# Altium PCB PCB1.PcbDoc
Units mm, origin at the board's own origin, x right, y up, seen from the top; angles counter-clockwise.
Board outline 34.92 x 80.14 mm, 2 copper layers (Top Layer, Bottom Layer); 138 components, 23 nets, 570 pads, 0 vias.
Unrouted connection lines stored in the file: 158.
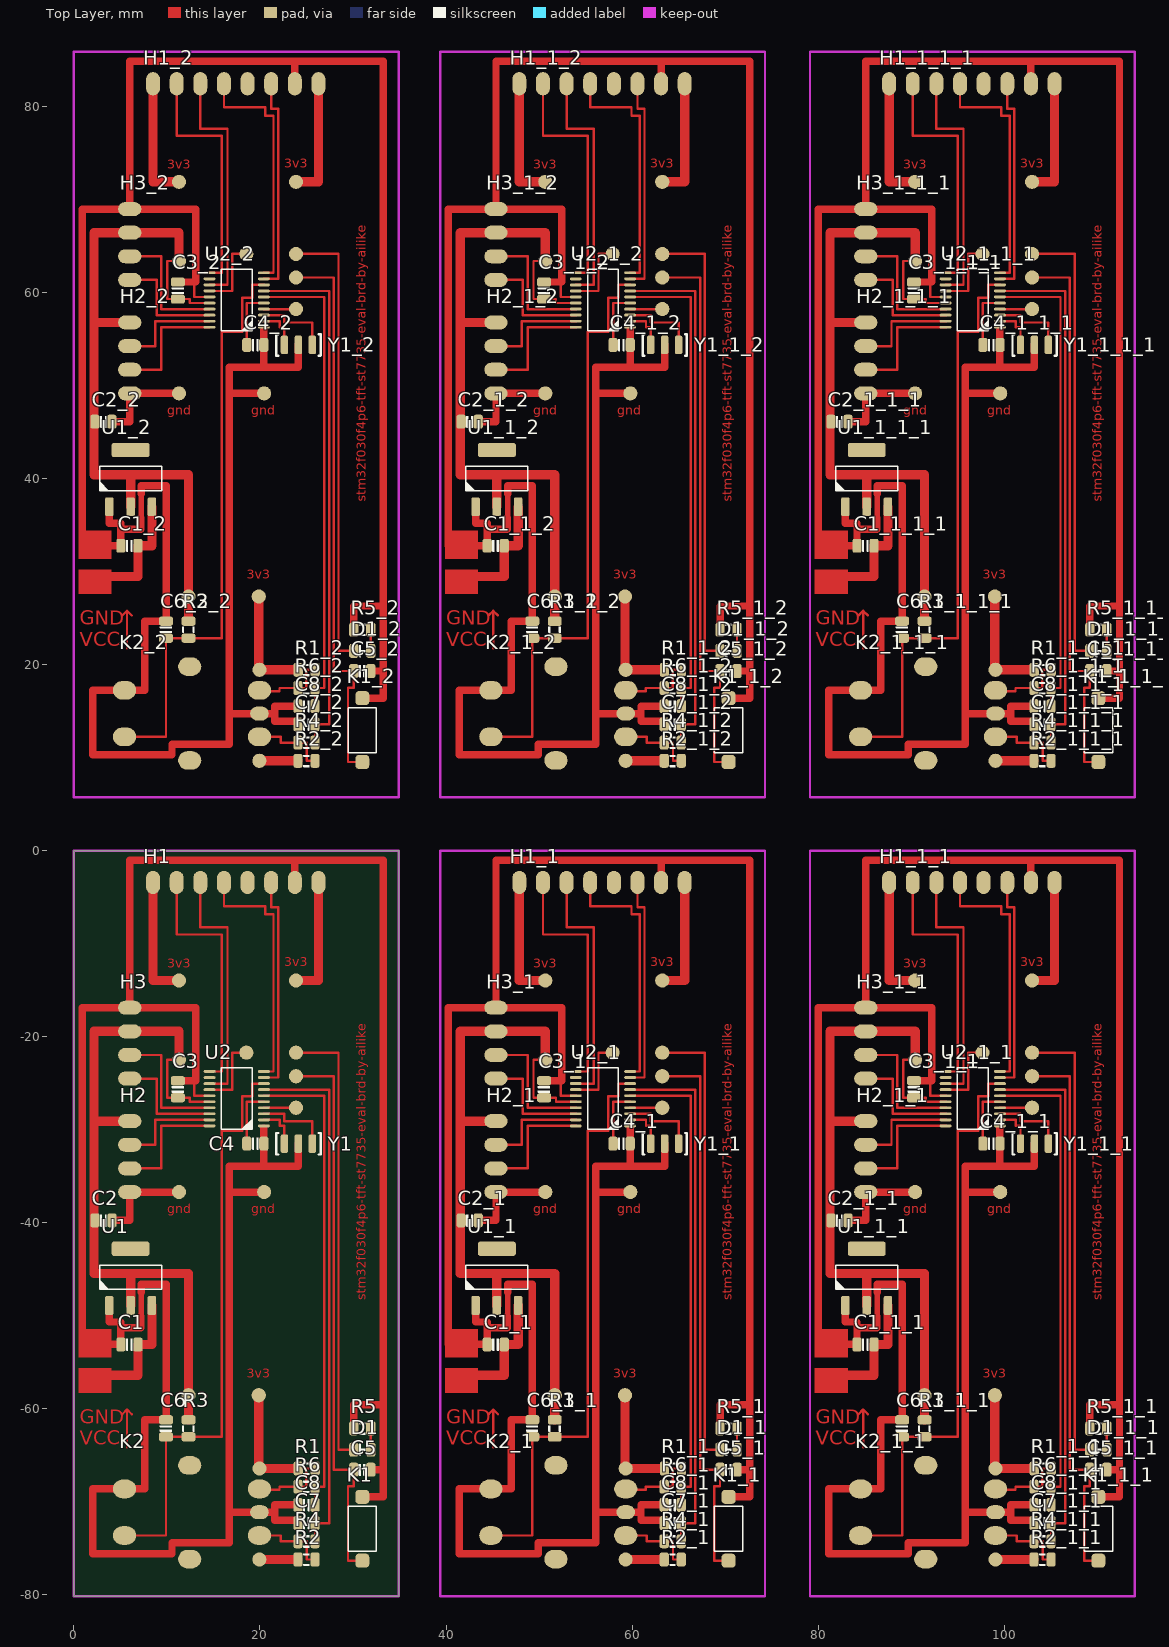
[diagram p0: Top Layer view]
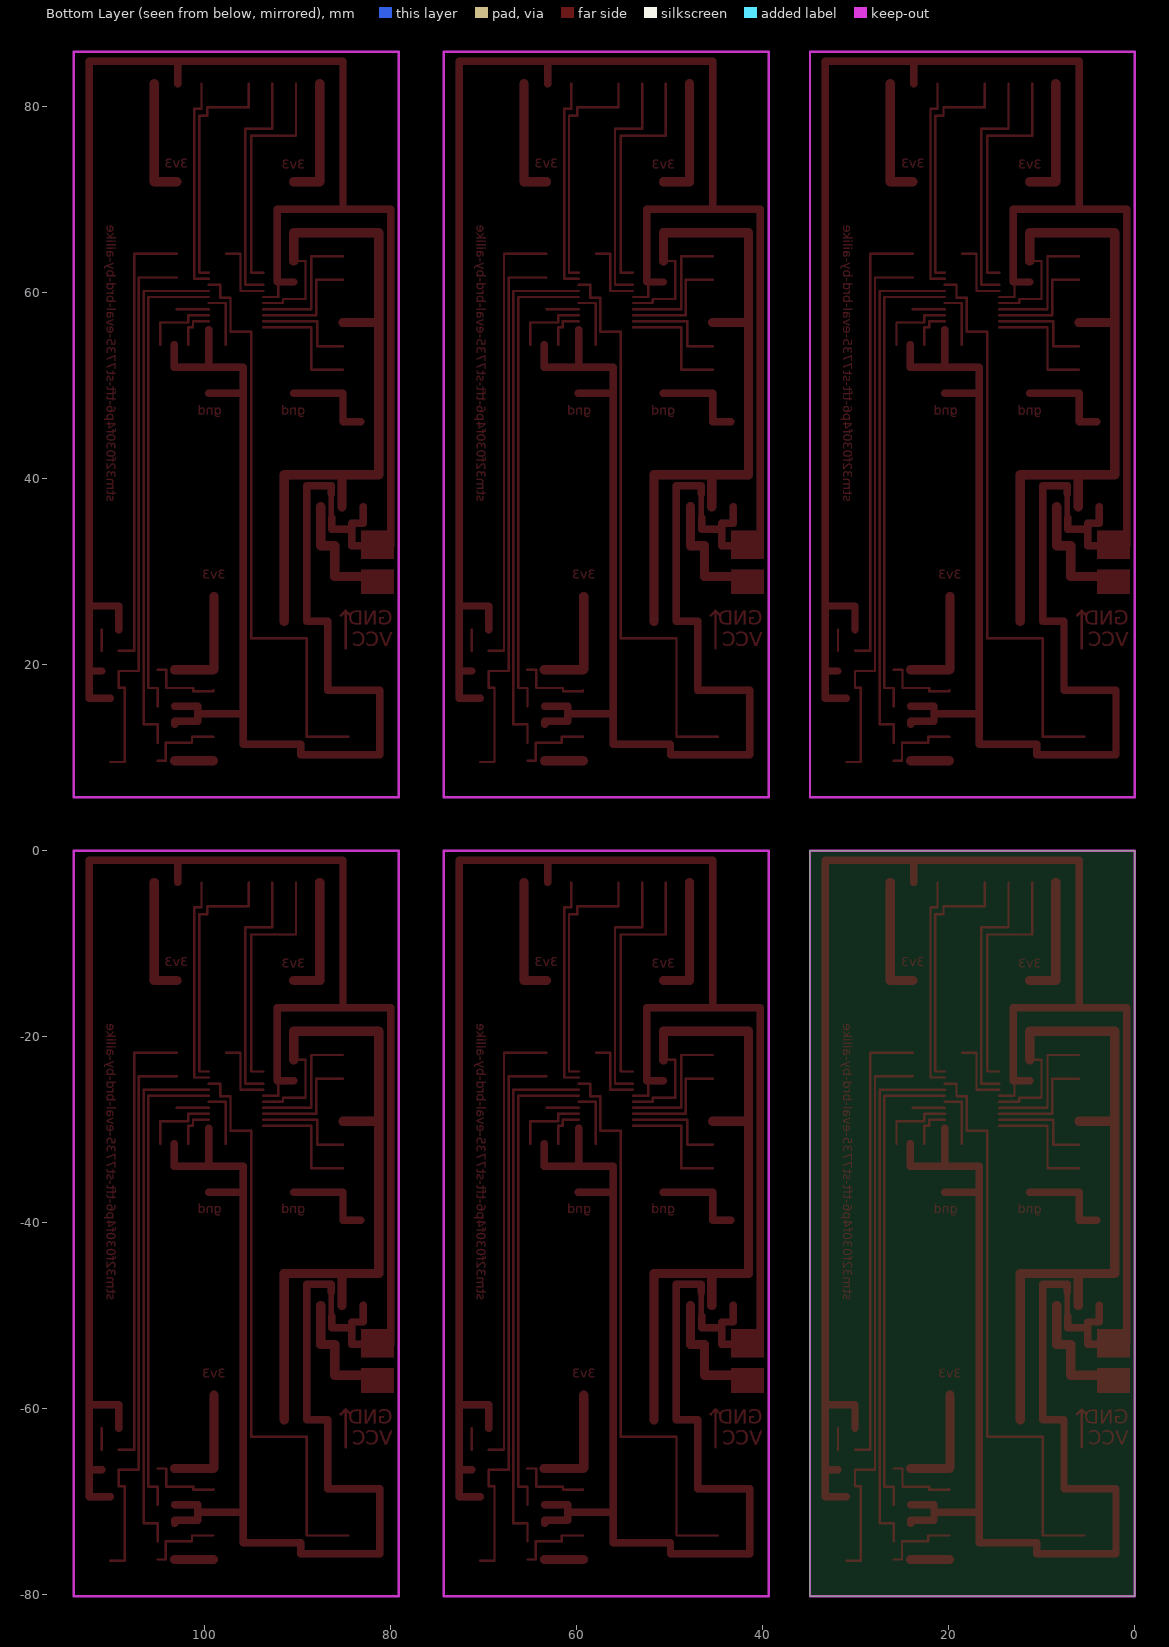
[diagram p1: Bottom Layer view, seen from below]

## Layer stack, top to bottom
Top Solder: solder mask 0.0102, Solder Resist, Dk 3.5
Top Layer: signal copper 0.0356
Dielectric 1: dielectric 0.32, FR-4, Dk 4.8
Bottom Layer: signal copper 0.0356
Bottom Solder: solder mask 0.0102, Solder Resist, Dk 3.5

## Board outline
0,-80.137 34.925,-80.137 34.925,0 0,0

## Design rules (kind name [scope] priority, off if disabled: settings)
Clearance [All] p1: gap=0.254 ignorepadtopadclearanceinfootprint=FALSE except(0: Arc-Hole Track-Hole SMDPad-Hole THPad-Hole Via-Hole Fill-Hole Poly-Hole Region-Hole Text-Hole)
PolygonConnect [All] p1: connectstyle=Relief reliefconductorwidth=0.254 reliefentries=4 polygonreliefangle="90 Angle" airgapwidth=0.254
RoutingVias [All] p1: holewidth=0.711 width=1.27 viastyle="Through Hole" minholewidth=0.711 minwidth=1.27 maxholewidth=0.711 maxwidth=1.27
SolderMaskExpansion [All] p1: expansion=0.102
Width [All] p1: maxlimit=10 minlimit=0.254 preferedwidth=0.254
30 further rules are at their usual default settings.

## Classes and differential pairs
component class Sheet1: C1 C2 C3 C4 C5 C6 C7 C8 D1 H1 H2 H3 K1 K2 R1 R2 R3 R4 R5 R6 U1 U2 Y1

## Components (designator, comment, footprint, x,y, rotation, side; value= is the part's Value field where it differs from the comment)
C1 "HDR2x10_2.54" CAP_0805 5.969,-53.086 r0 top value=0.1uf
C1_1 "HDR2x10_2.54" CAP_0805 45.339,-53.086 r0 top value=0.1uf (schematic designator C1)
C1_1_1 "HDR2x10_2.54" CAP_0805 85.09,-53.086 r0 top value=0.1uf (schematic designator C1)
C1_1_1_1 "HDR2x10_2.54" CAP_0805 85.09,32.766 r0 top value=0.1uf (schematic designator C1)
C1_1_2 "HDR2x10_2.54" CAP_0805 45.339,32.766 r0 top value=0.1uf (schematic designator C1)
C1_2 "HDR2x10_2.54" CAP_0805 5.969,32.766 r0 top value=0.1uf (schematic designator C1)
C2 "HDR2x10_2.54" CAP_0805 3.175,-39.751 r180 top value=0,1uf
C2_1 "HDR2x10_2.54" CAP_0805 42.545,-39.751 r180 top value=0,1uf (schematic designator C2)
C2_1_1 "HDR2x10_2.54" CAP_0805 82.296,-39.751 r180 top value=0,1uf (schematic designator C2)
C2_1_1_1 "HDR2x10_2.54" CAP_0805 82.296,46.101 r180 top value=0,1uf (schematic designator C2)
C2_1_2 "HDR2x10_2.54" CAP_0805 42.545,46.101 r180 top value=0,1uf (schematic designator C2)
C2_2 "HDR2x10_2.54" CAP_0805 3.175,46.101 r180 top value=0,1uf (schematic designator C2)
C3 "HDR2x10_2.54" CAP_0805 11.176,-25.654 r270 top value=0.1uf
C3_1 "HDR2x10_2.54" CAP_0805 50.546,-25.654 r270 top value=0.1uf (schematic designator C3)
C3_1_1 "HDR2x10_2.54" CAP_0805 90.297,-25.654 r270 top value=0.1uf (schematic designator C3)
C3_1_1_1 "HDR2x10_2.54" CAP_0805 90.297,60.198 r270 top value=0.1uf (schematic designator C3)
C3_1_2 "HDR2x10_2.54" CAP_0805 50.546,60.198 r270 top value=0.1uf (schematic designator C3)
C3_2 "HDR2x10_2.54" CAP_0805 11.176,60.198 r270 top value=0.1uf (schematic designator C3)
C4 "HDR2x10_2.54" CAP_0805 19.507,-31.496 r0 top value=0.1uf
C4_1 "HDR2x10_2.54" CAP_0805 58.877,-31.496 r0 top value=0.1uf (schematic designator C4)
C4_1_1 "HDR2x10_2.54" CAP_0805 98.628,-31.496 r0 top value=0.1uf (schematic designator C4)
C4_1_1_1 "HDR2x10_2.54" CAP_0805 98.628,54.356 r0 top value=0.1uf (schematic designator C4)
C4_1_2 "HDR2x10_2.54" CAP_0805 58.877,54.356 r0 top value=0.1uf (schematic designator C4)
C4_2 "HDR2x10_2.54" CAP_0805 19.507,54.356 r0 top value=0.1uf (schematic designator C4)
C5 "HDR2x10_2.54" CAP_0805 31,-66.548 r180 top value=0.1uf
C5_1 "HDR2x10_2.54" CAP_0805 70.37,-66.548 r180 top value=0.1uf (schematic designator C5)
C5_1_1 "HDR2x10_2.54" CAP_0805 110.121,-66.548 r180 top value=0.1uf (schematic designator C5)
C5_1_1_1 "HDR2x10_2.54" CAP_0805 110.121,19.304 r180 top value=0.1uf (schematic designator C5)
C5_1_2 "HDR2x10_2.54" CAP_0805 70.37,19.304 r180 top value=0.1uf (schematic designator C5)
C5_2 "HDR2x10_2.54" CAP_0805 31,19.304 r180 top value=0.1uf (schematic designator C5)
C6 "HDR2x10_2.54" CAP_0805 9.906,-62.103 r270 top value=0.1uf
C6_1 "HDR2x10_2.54" CAP_0805 49.276,-62.103 r270 top value=0.1uf (schematic designator C6)
C6_1_1 "HDR2x10_2.54" CAP_0805 89.027,-62.103 r270 top value=0.1uf (schematic designator C6)
C6_1_1_1 "HDR2x10_2.54" CAP_0805 89.027,23.749 r270 top value=0.1uf (schematic designator C6)
C6_1_2 "HDR2x10_2.54" CAP_0805 49.276,23.749 r270 top value=0.1uf (schematic designator C6)
C6_2 "HDR2x10_2.54" CAP_0805 9.906,23.749 r270 top value=0.1uf (schematic designator C6)
C7 "HDR2x10_2.54" CAP_0805 25,-72.288 r0 top value=10nf
C7_1 "HDR2x10_2.54" CAP_0805 64.37,-72.288 r0 top value=10nf (schematic designator C7)
C7_1_1 "HDR2x10_2.54" CAP_0805 104.121,-72.288 r0 top value=10nf (schematic designator C7)
C7_1_1_1 "HDR2x10_2.54" CAP_0805 104.121,13.564 r0 top value=10nf (schematic designator C7)
C7_1_2 "HDR2x10_2.54" CAP_0805 64.37,13.564 r0 top value=10nf (schematic designator C7)
C7_2 "HDR2x10_2.54" CAP_0805 25,13.564 r0 top value=10nf (schematic designator C7)
C8 "HDR2x10_2.54" CAP_0805 25,-70.333 r0 top value=10nf
C8_1 "HDR2x10_2.54" CAP_0805 64.37,-70.333 r0 top value=10nf (schematic designator C8)
C8_1_1 "HDR2x10_2.54" CAP_0805 104.121,-70.333 r0 top value=10nf (schematic designator C8)
C8_1_1_1 "HDR2x10_2.54" CAP_0805 104.121,15.519 r0 top value=10nf (schematic designator C8)
C8_1_2 "HDR2x10_2.54" CAP_0805 64.37,15.519 r0 top value=10nf (schematic designator C8)
C8_2 "HDR2x10_2.54" CAP_0805 25,15.519 r0 top value=10nf (schematic designator C8)
D1 "HDR2x10_2.54" LED_0805_RED 31,-64.389 r0 top value=color?
D1_1 "HDR2x10_2.54" LED_0805_RED 70.37,-64.389 r0 top value=color? (schematic designator D1)
D1_1_1 "HDR2x10_2.54" LED_0805_RED 110.121,-64.389 r0 top value=color? (schematic designator D1)
D1_1_1_1 "HDR2x10_2.54" LED_0805_RED 110.121,21.463 r0 top value=color? (schematic designator D1)
D1_1_2 "HDR2x10_2.54" LED_0805_RED 70.37,21.463 r0 top value=color? (schematic designator D1)
D1_2 "HDR2x10_2.54" LED_0805_RED 31,21.463 r0 top value=color? (schematic designator D1)
H1 "HDR2x10_2.54" HDR1X8_2.54_180 26.289,-3.429 r270 top locked value=2.54
H1_1 "HDR2x10_2.54" HDR1X8_2.54_180 65.659,-3.429 r270 top locked value=2.54 (schematic designator H1)
H1_1_1 "HDR2x10_2.54" HDR1X8_2.54_180 105.41,-3.429 r270 top locked value=2.54 (schematic designator H1)
H1_1_1_1 "HDR2x10_2.54" HDR1X8_2.54_180 105.41,82.423 r270 top locked value=2.54 (schematic designator H1)
H1_1_2 "HDR2x10_2.54" HDR1X8_2.54_180 65.659,82.423 r270 top locked value=2.54 (schematic designator H1)
H1_2 "HDR2x10_2.54" HDR1X8_2.54_180 26.289,82.423 r270 top locked value=2.54 (schematic designator H1)
H2 "HDR2x10_2.54" HDR1x4_2.54_180 6,-29.083 r0 top locked
H2_1 "HDR2x10_2.54" HDR1x4_2.54_180 45.37,-29.083 r0 top locked (schematic designator H2)
H2_1_1 "HDR2x10_2.54" HDR1x4_2.54_180 85.121,-29.083 r0 top locked (schematic designator H2)
H2_1_1_1 "HDR2x10_2.54" HDR1x4_2.54_180 85.121,56.769 r0 top locked (schematic designator H2)
H2_1_2 "HDR2x10_2.54" HDR1x4_2.54_180 45.37,56.769 r0 top locked (schematic designator H2)
H2_2 "HDR2x10_2.54" HDR1x4_2.54_180 6,56.769 r0 top locked (schematic designator H2)
H3 "HDR2x10_2.54" HDR1x4_2.54_180 6,-16.891 r0 top locked
H3_1 "HDR2x10_2.54" HDR1x4_2.54_180 45.37,-16.891 r0 top locked (schematic designator H3)
H3_1_1 "HDR2x10_2.54" HDR1x4_2.54_180 85.121,-16.891 r0 top locked (schematic designator H3)
H3_1_1_1 "HDR2x10_2.54" HDR1x4_2.54_180 85.121,68.961 r0 top locked (schematic designator H3)
H3_1_2 "HDR2x10_2.54" HDR1x4_2.54_180 45.37,68.961 r0 top locked (schematic designator H3)
H3_2 "HDR2x10_2.54" HDR1x4_2.54_180 6,68.961 r0 top locked (schematic designator H3)
K1 "HDR2x10_2.54" ButtonTACT_3x6x2.5_180 31,-72.898 r90 top value=3x6
K1_1 "HDR2x10_2.54" ButtonTACT_3x6x2.5_180 70.37,-72.898 r90 top value=3x6 (schematic designator K1)
K1_1_1 "HDR2x10_2.54" ButtonTACT_3x6x2.5_180 110.121,-72.898 r90 top value=3x6 (schematic designator K1)
K1_1_1_1 "HDR2x10_2.54" ButtonTACT_3x6x2.5_180 110.121,12.954 r90 top value=3x6 (schematic designator K1)
K1_1_2 "HDR2x10_2.54" ButtonTACT_3x6x2.5_180 70.37,12.954 r90 top value=3x6 (schematic designator K1)
K1_2 "HDR2x10_2.54" ButtonTACT_3x6x2.5_180 31,12.954 r90 top value=3x6 (schematic designator K1)
K2 "HDR2x10_2.54" RotaryEncoder 12.446,-71.12 r90 top value=RotaryEncoder
K2_1 "HDR2x10_2.54" RotaryEncoder 51.816,-71.12 r90 top value=RotaryEncoder (schematic designator K2)
K2_1_1 "HDR2x10_2.54" RotaryEncoder 91.567,-71.12 r90 top value=RotaryEncoder (schematic designator K2)
K2_1_1_1 "HDR2x10_2.54" RotaryEncoder 91.567,14.732 r90 top value=RotaryEncoder (schematic designator K2)
K2_1_2 "HDR2x10_2.54" RotaryEncoder 51.816,14.732 r90 top value=RotaryEncoder (schematic designator K2)
K2_2 "HDR2x10_2.54" RotaryEncoder 12.446,14.732 r90 top value=RotaryEncoder (schematic designator K2)
R1 "HDR2x10_2.54" RES_0805 25.019,-66.421 r180 top value=10K
R1_1 "HDR2x10_2.54" RES_0805 64.389,-66.421 r180 top value=10K (schematic designator R1)
R1_1_1 "HDR2x10_2.54" RES_0805 104.14,-66.421 r180 top value=10K (schematic designator R1)
R1_1_1_1 "HDR2x10_2.54" RES_0805 104.14,19.431 r180 top value=10K (schematic designator R1)
R1_1_2 "HDR2x10_2.54" RES_0805 64.389,19.431 r180 top value=10K (schematic designator R1)
R1_2 "HDR2x10_2.54" RES_0805 25.019,19.431 r180 top value=10K (schematic designator R1)
R2 "HDR2x10_2.54" RES_0805 25,-76.2 r180 top value=10K
R2_1 "HDR2x10_2.54" RES_0805 64.37,-76.2 r180 top value=10K (schematic designator R2)
R2_1_1 "HDR2x10_2.54" RES_0805 104.121,-76.2 r180 top value=10K (schematic designator R2)
R2_1_1_1 "HDR2x10_2.54" RES_0805 104.121,9.652 r180 top value=10K (schematic designator R2)
R2_1_2 "HDR2x10_2.54" RES_0805 64.37,9.652 r180 top value=10K (schematic designator R2)
R2_2 "HDR2x10_2.54" RES_0805 25,9.652 r180 top value=10K (schematic designator R2)
R3 "HDR2x10_2.54" RES_0805 12.319,-62.103 r270 top value=10k
R3_1 "HDR2x10_2.54" RES_0805 51.689,-62.103 r270 top value=10k (schematic designator R3)
R3_1_1 "HDR2x10_2.54" RES_0805 91.44,-62.103 r270 top value=10k (schematic designator R3)
R3_1_1_1 "HDR2x10_2.54" RES_0805 91.44,23.749 r270 top value=10k (schematic designator R3)
R3_1_2 "HDR2x10_2.54" RES_0805 51.689,23.749 r270 top value=10k (schematic designator R3)
R3_2 "HDR2x10_2.54" RES_0805 12.319,23.749 r270 top value=10k (schematic designator R3)
R4 "HDR2x10_2.54" RES_0805 25,-74.244 r180 top value=10K
R4_1 "HDR2x10_2.54" RES_0805 64.37,-74.244 r180 top value=10K (schematic designator R4)
R4_1_1 "HDR2x10_2.54" RES_0805 104.121,-74.244 r180 top value=10K (schematic designator R4)
R4_1_1_1 "HDR2x10_2.54" RES_0805 104.121,11.608 r180 top value=10K (schematic designator R4)
R4_1_2 "HDR2x10_2.54" RES_0805 64.37,11.608 r180 top value=10K (schematic designator R4)
R4_2 "HDR2x10_2.54" RES_0805 25,11.608 r180 top value=10K (schematic designator R4)
R5 "HDR2x10_2.54" RES_0805 31,-62.103 r180 top value=1K
R5_1 "HDR2x10_2.54" RES_0805 70.37,-62.103 r180 top value=1K (schematic designator R5)
R5_1_1 "HDR2x10_2.54" RES_0805 110.121,-62.103 r180 top value=1K (schematic designator R5)
R5_1_1_1 "HDR2x10_2.54" RES_0805 110.121,23.749 r180 top value=1K (schematic designator R5)
R5_1_2 "HDR2x10_2.54" RES_0805 70.37,23.749 r180 top value=1K (schematic designator R5)
R5_2 "HDR2x10_2.54" RES_0805 31,23.749 r180 top value=1K (schematic designator R5)
R6 "HDR2x10_2.54" RES_0805 25,-68.377 r180 top value=10k
R6_1 "HDR2x10_2.54" RES_0805 64.37,-68.377 r180 top value=10k (schematic designator R6)
R6_1_1 "HDR2x10_2.54" RES_0805 104.121,-68.377 r180 top value=10k (schematic designator R6)
R6_1_1_1 "HDR2x10_2.54" RES_0805 104.121,17.475 r180 top value=10k (schematic designator R6)
R6_1_2 "HDR2x10_2.54" RES_0805 64.37,17.475 r180 top value=10k (schematic designator R6)
R6_2 "HDR2x10_2.54" RES_0805 25,17.475 r180 top value=10k (schematic designator R6)
U1 "HDR2x10_2.54" SOT223-3 6.096,-45.847 r90 top
U1_1 "HDR2x10_2.54" SOT223-3 45.466,-45.847 r90 top (schematic designator U1)
U1_1_1 "HDR2x10_2.54" SOT223-3 85.217,-45.847 r90 top (schematic designator U1)
U1_1_1_1 "HDR2x10_2.54" SOT223-3 85.217,40.005 r90 top (schematic designator U1)
U1_1_2 "HDR2x10_2.54" SOT223-3 45.466,40.005 r90 top (schematic designator U1)
U1_2 "HDR2x10_2.54" SOT223-3 6.096,40.005 r90 top (schematic designator U1)
U2 "HDR2x10_2.54" TSSOP_E170_P0.65_20 17.5,-26.67 r180 top
U2_1 "HDR2x10_2.54" TSSOP_E170_P0.65_20 56.87,-26.67 r180 top (schematic designator U2)
U2_1_1 "HDR2x10_2.54" TSSOP_E170_P0.65_20 96.621,-26.67 r180 top (schematic designator U2)
U2_1_1_1 "HDR2x10_2.54" TSSOP_E170_P0.65_20 96.621,59.182 r180 top (schematic designator U2)
U2_1_2 "HDR2x10_2.54" TSSOP_E170_P0.65_20 56.87,59.182 r180 top (schematic designator U2)
U2_2 "HDR2x10_2.54" TSSOP_E170_P0.65_20 17.5,59.182 r180 top (schematic designator U2)
Y1 "HDR2x10_2.54" XTAL_3P_CSTCE_8M_3.2*1.3 22.63,-31.496 r90 top
Y1_1 "HDR2x10_2.54" XTAL_3P_CSTCE_8M_3.2*1.3 62,-31.496 r90 top (schematic designator Y1)
Y1_1_1 "HDR2x10_2.54" XTAL_3P_CSTCE_8M_3.2*1.3 101.751,-31.496 r90 top (schematic designator Y1)
Y1_1_1_1 "HDR2x10_2.54" XTAL_3P_CSTCE_8M_3.2*1.3 101.751,54.356 r90 top (schematic designator Y1)
Y1_1_2 "HDR2x10_2.54" XTAL_3P_CSTCE_8M_3.2*1.3 62,54.356 r90 top (schematic designator Y1)
Y1_2 "HDR2x10_2.54" XTAL_3P_CSTCE_8M_3.2*1.3 22.63,54.356 r90 top (schematic designator Y1)

## Footprints (in the part's own frame and the unit in brackets; to place one, negate y for a bottom-side part, rotate by r counter-clockwise, add the part's x,y. Pads: shape width x height; smd on the part's side, far side on the other; paste and mask are expansions set on the pad)
ButtonTACT_3x6x2.5_180 [mm]
  rrect50% 1.5x1.5 smd: 1(-3.429,0) 2(3.429,0)
  silkscreen extent -2.41,-1.52 2.41,1.52, body extent -4,-1.8 4,1.8, height 2.4
CAP_0805 [mm]
  rrect50% 1x1.5 smd: 1(-0.914,0) 2(0.914,0)
  silkscreen extent -0.3,-0.61 0.3,0.61, body extent -1,-0.62 1,0.63, height 1
HDR1x4_2.54_180 [mm]
  oval 2.5x1.5 smd: 1(0,0) 2(0,-2.54) 3(0,-5.08) 4(0,-7.62)
  body extent -1.25,-8.89 1.25,1.27, height 8.2
HDR1X8_2.54_180 [mm]
  oval 2.5x1.5 smd: 1(0,0) 2(0,-2.54) 3(0,-5.08) 4(0,-7.62) 5(0,-10.16) 6(0,-12.7) 7(0,-15.24) 8(0,-17.78)
  body extent -1.25,-19.05 1.25,1.27, height 8.2
LED_0805_RED [mm]
  rrect50% 1x1.5 smd: 1(-0.914,0) 2(0.914,0)
  silkscreen extent -0.29,-0.62 0.3,0.62, body extent -1.01,-0.62 1.01,0.63, height 1.1
RES_0805 [mm]
  rrect50% 1x1.5 smd: 1(-0.914,0) 2(0.914,0)
  silkscreen extent -0.29,-0.62 0.29,0.62, body extent -1,-0.62 1,0.63, height 0.6
RotaryEncoder [mm]
  oval 1.981x2.489 smd: 0(-5.04,0) 0(5.04,0)
  oval 2x2.5 smd: 1(-2.5,-7.5) 3(2.5,-7.5) 4(2.5,7) 5(-2.5,7)
  oval 1.5x2 smd: 2(0,-7.5)
SOT223-3 [mil]
  rrect40% 80x36 smd: 1(-120,90.16) 2(-120,0) 3(-120,-90.16)
  rrect30% 60x160 smd: 4(120,0)
  silkscreen extent -51,-131 51,131, body extent -144,-132 144,132, height 71
TSSOP_E170_P0.65_20 [mil]
  oval 50x12 smd: 1(-115,115.16) 2(-115,89.57) 3(-115,63.98) 4(-115,38.39) 5(-115,12.8) 6(-115,-12.8) 7(-115,-38.39) 8(-115,-63.98) 9(-115,-89.57) 10(-115,-115.16) 11(115,-115.16) 12(115,-89.57) 13(115,-63.98) 14(115,-38.39) 15(115,-12.8) 16(115,12.8) 17(115,38.39) 18(115,63.98) 19(115,89.57) 20(115,115.16)
  silkscreen extent -65,-130 65,130, body extent -126,-130 126,130, height 42
XTAL_3P_CSTCE_8M_3.2*1.3 [mm]
  rrect50% 2x0.8 smd: 1(0,0) 2(0,-1.5) 3(0,-3)
  silkscreen extent -1.17,-3.89 1.14,0.86, body extent -1,-3.75 1,0.75, height 1.15

## Part data
C1 C1_1 C1_1_1 C1_1_1_1 C1_1_2 C1_2 C2 C2_1 C2_1_1 C2_1_1_1 C2_1_2 C2_2 C3 C3_1 C3_1_1 C3_1_1_1 C3_1_2 C3_2 C4 C4_1 C4_1_1 C4_1_1_1 C4_1_2 C4_2 C5 C5_1 C5_1_1 C5_1_1_1 C5_1_2 C5_2 C6 C6_1 C6_1_1 C6_1_1_1 C6_1_2 C6_2 C7 C7_1 C7_1_1 C7_1_1_1 C7_1_2 C7_2 C8 C8_1 C8_1_1 C8_1_1_1 C8_1_2 C8_2: library part Cap_0805, "Capacitor", Specification="X7R 50V", Type=0805
D1 D1_1 D1_1_1 D1_1_1_1 D1_1_2 D1_2: library part LED_0805, "LED", Type=0805
H1 H1_1 H1_1_1 H1_1_1_1 H1_1_2 H1_2: library part HDR1x8_2.54, "Header", Type="DIP 1x8"
H2 H2_1 H2_1_1 H2_1_1_1 H2_1_2 H2_2 H3 H3_1 H3_1_1 H3_1_1_1 H3_1_2 H3_2: library part HDR1x4_2.54, "Header"
K1 K1_1 K1_1_1 K1_1_1_1 K1_1_2 K1_2: library part ButtonTACT_3x6x2.5_180, "Button", Type="TACT 2P"
K2 K2_1 K2_1_1 K2_1_1_1 K2_1_2 K2_2: library part RotaryEncoder, "Encoder"
R1 R1_1 R1_1_1 R1_1_1_1 R1_1_2 R1_2 R2 R2_1 R2_1_1 R2_1_1_1 R2_1_2 R2_2 R3 R3_1 R3_1_1 R3_1_1_1 R3_1_2 R3_2 R4 R4_1 R4_1_1 R4_1_1_1 R4_1_2 R4_2 R5 R5_1 R5_1_1 R5_1_1_1 R5_1_2 R5_2 R6 R6_1 R6_1_1 R6_1_1_1 R6_1_2 R6_2: library part Res_0805, "Resistor", Specification=±5%, Type=0805
U1 U1_1 U1_1_1 U1_1_1_1 U1_1_2 U1_2: library part TLV1117, "Power"
U2 U2_1 U2_1_1 U2_1_1_1 U2_1_2 U2_2: library part STM32F03xF, "MCU"
Y1 Y1_1 Y1_1_1 Y1_1_1_1 Y1_1_2 Y1_2: library part XTAL-3PIN, "murata CSTCE 8M 3.2*1.3"

## Free pads (board coordinates)
  round 1.524 smd: 2(11.303,-36.703) 2(11.303,-22.479) 2(11.303,-13.97) 2(11.303,49.149) 2(11.303,63.373) 2(11.303,71.882) 2(12.319,-58.547) 2(12.319,27.305) 2(18.542,-21.717) 2(18.542,64.135) 2(19.874,-58.547) 2(19.874,27.305) 2(19.939,-76.2) 2(19.939,9.652) 2(19.946,-66.421) 2(19.946,19.431) 2(20.447,-36.703) 2(20.447,49.149) 2(23.876,-27.645) 2(23.876,-24.257) 2(23.876,-21.717) 2(23.876,-13.97) 2(23.876,58.207) 2(23.876,61.595) 2(23.876,64.135) 2(23.876,71.882) 2(50.673,-36.703) 2(50.673,-22.479) 2(50.673,-13.97) 2(50.673,49.149) 2(50.673,63.373) 2(50.673,71.882) 2(51.689,-58.547) 2(51.689,27.305) 2(57.912,-21.717) 2(57.912,64.135) 2(59.244,-58.547) 2(59.244,27.305) 2(59.309,-76.2) 2(59.309,9.652) 2(59.316,-66.421) 2(59.316,19.431) 2(59.817,-36.703) 2(59.817,49.149) 2(63.246,-27.645) 2(63.246,-24.257) 2(63.246,-21.717) 2(63.246,-13.97) 2(63.246,58.207) 2(63.246,61.595) 2(63.246,64.135) 2(63.246,71.882) 2(90.424,-36.703) 2(90.424,-22.479) 2(90.424,-13.97) 2(90.424,49.149) 2(90.424,63.373) 2(90.424,71.882) 2(91.44,-58.547) 2(91.44,27.305) 2(97.663,-21.717) 2(97.663,64.135) 2(98.995,-58.547) 2(98.995,27.305) 2(99.06,-76.2) 2(99.06,9.652) 2(99.067,-66.421) 2(99.067,19.431) 2(99.568,-36.703) 2(99.568,49.149) 2(102.997,-27.645) 2(102.997,-24.257) 2(102.997,-21.717) 2(102.997,-13.97) 2(102.997,58.207) 2(102.997,61.595) 2(102.997,64.135) 2(102.997,71.882)

## Nets (pads, with @x,y where several pads share a name; then routed paths per layer and width w, separated by ;. In a path a pad name is that pad's centre, name@x,y a point inside that pad or via, vN(x,y) a via of type N, cw(c..) or ccw(c..) an arc to the next point about the centre after c; other vN are vias at no path point)
3V3: C2.2 C2_1.2 C2_1_1.2 C2_1_1_1.2 C2_1_2.2 C2_2.2 C3.2 C3_1.2 C3_1_1.2 C3_1_1_1.2 C3_1_2.2 C3_2.2 C4.1 C4_1.1 C4_1_1.1 C4_1_1_1.1 C4_1_2.1 C4_2.1 H1.1 H1.8 H1_1.1 H1_1.8 H1_1_1.1 H1_1_1.8 H1_1_1_1.1 H1_1_1_1.8 H1_1_2.1 H1_1_2.8 H1_2.1 H1_2.8 H2.1 H2_1.1 H2_1_1.1 H2_1_1_1.1 H2_1_2.1 H2_2.1 H3.2 H3_1.2 H3_1_1.2 H3_1_1_1.2 H3_1_2.2 H3_2.2 pad.2@11.303,63.373 pad.2@11.303,71.882 pad.2@11.303,-13.97 pad.2@11.303,-22.479 pad.2@12.319,27.305 pad.2@12.319,-58.547 pad.2@19.874,27.305 pad.2@19.874,-58.547 pad.2@19.939,9.652 pad.2@19.939,-76.2 pad.2@19.946,19.431 pad.2@19.946,-66.421 pad.2@23.876,71.882 pad.2@23.876,-13.97 pad.2@50.673,63.373 pad.2@50.673,71.882 pad.2@50.673,-13.97 pad.2@50.673,-22.479 pad.2@51.689,27.305 pad.2@51.689,-58.547 pad.2@59.244,27.305 pad.2@59.244,-58.547 pad.2@59.309,9.652 pad.2@59.309,-76.2 pad.2@59.316,19.431 pad.2@59.316,-66.421 pad.2@63.246,71.882 pad.2@63.246,-13.97 pad.2@90.424,63.373 pad.2@90.424,71.882 pad.2@90.424,-13.97 pad.2@90.424,-22.479 pad.2@91.44,27.305 pad.2@91.44,-58.547 pad.2@98.995,27.305 pad.2@98.995,-58.547 pad.2@99.06,9.652 pad.2@99.06,-76.2 pad.2@99.067,19.431 pad.2@99.067,-66.421 pad.2@102.997,71.882 pad.2@102.997,-13.97 R1.2 R1_1.2 R1_1_1.2 R1_1_1_1.2 R1_1_2.2 R1_2.2 R2.2 R2_1.2 R2_1_1.2 R2_1_1_1.2 R2_1_2.2 R2_2.2 R3.1 R3_1.1 R3_1_1.1 R3_1_1_1.1 R3_1_2.1 R3_2.1 U1.2 U1_1.2 U1_1_1.2 U1_1_1_1.2 U1_1_2.2 U1_2.2 U2.5 U2.16 U2_1.5 U2_1.16 U2_1_1.5 U2_1_1.16 U2_1_1_1.5 U2_1_1_1.16 U2_1_2.5 U2_1_2.16 U2_2.5 U2_2.16 | length 783.2
  Top Layer w0.254: pad.2@11.303,-22.479 10.033,-22.479 10.033,-26.565 12.446,-26.565 12.446,-26.995 U2.16 ; pad.2@11.303,63.373 10.033,63.373 10.033,59.287 12.446,59.287 12.446,58.857 U2_2.16 ; C4.1 18.592,-26.995 U2.5 ; C4_2.1 18.592,58.857 U2_2.5 ; pad.2@50.673,-22.479 49.403,-22.479 49.403,-26.565 51.816,-26.565 51.816,-26.995 U2_1.16 ; pad.2@50.673,63.373 49.403,63.373 49.403,59.287 51.816,59.287 51.816,58.857 U2_1_2.16 ; C4_1.1 57.962,-26.995 U2_1.5 ; C4_1_2.1 57.962,58.857 U2_1_2.5 ; pad.2@90.424,-22.479 89.154,-22.479 89.154,-26.565 91.567,-26.565 91.567,-26.995 U2_1_1.16 ; pad.2@90.424,63.373 89.154,63.373 89.154,59.287 91.567,59.287 91.567,58.857 U2_1_1_1.16 ; C4_1_1.1 97.713,-26.995 U2_1_1.5 ; C4_1_1_1.1 97.713,58.857 U2_1_1_1.5
  Top Layer w1: H2.1 2.159,-29.083 ; H2_2.1 2.159,56.769 ; U1.2 6.096,-45.466 ; U1_2.2 6.096,40.386 ; H1.8 8.509,-13.97 pad.2@11.303,-13.97 ; H1_2.8 8.509,71.882 pad.2@11.303,71.882 ; pad.2@11.303,-22.479 11.303,-19.431 H3.2 2.159,-19.431 2.159,-29.083 ; pad.2@11.303,63.373 11.303,66.421 H3_2.2 2.159,66.421 2.159,56.769 ; R3.1 12.319,-45.466 6.096,-45.466 ; R3_2.1 12.319,40.386 6.096,40.386 ; pad.2@19.874,-58.547 19.874,-66.349 19.946,-66.421 R1.2 ; pad.2@19.874,27.305 19.874,19.503 19.946,19.431 R1_2.2 ; pad.2@19.939,-76.2 R2.2 ; pad.2@19.939,9.652 R2_2.2 ; pad.2@23.876,-13.97 26.289,-13.97 H1.1 ; pad.2@23.876,71.882 26.289,71.882 H1_2.1 ; H2_1.1 41.529,-29.083 ; H2_1_2.1 41.529,56.769 ; U1_1.2 45.466,-45.466 ; U1_1_2.2 45.466,40.386 ; H1_1.8 47.879,-13.97 pad.2@50.673,-13.97 ; H1_1_2.8 47.879,71.882 pad.2@50.673,71.882 ; pad.2@50.673,-22.479 50.673,-19.431 H3_1.2 41.529,-19.431 41.529,-29.083 ; pad.2@50.673,63.373 50.673,66.421 H3_1_2.2 41.529,66.421 41.529,56.769 ; R3_1.1 51.689,-45.466 45.466,-45.466 ; R3_1_2.1 51.689,40.386 45.466,40.386 ; pad.2@59.244,-58.547 59.244,-66.349 59.316,-66.421 R1_1.2 ; pad.2@59.244,27.305 59.244,19.503 59.316,19.431 R1_1_2.2 ; pad.2@59.309,-76.2 R2_1.2 ; pad.2@59.309,9.652 R2_1_2.2 ; pad.2@63.246,-13.97 65.659,-13.97 H1_1.1 ; pad.2@63.246,71.882 65.659,71.882 H1_1_2.1 ; H2_1_1.1 81.28,-29.083 ; H2_1_1_1.1 81.28,56.769 ; U1_1_1.2 85.217,-45.466 ; U1_1_1_1.2 85.217,40.386 ; H1_1_1.8 87.63,-13.97 pad.2@90.424,-13.97 ; H1_1_1_1.8 87.63,71.882 pad.2@90.424,71.882 ; pad.2@90.424,-22.479 90.424,-19.431 H3_1_1.2 81.28,-19.431 81.28,-29.083 ; pad.2@90.424,63.373 90.424,66.421 H3_1_1_1.2 81.28,66.421 81.28,56.769 ; R3_1_1.1 91.44,-45.466 85.217,-45.466 ; R3_1_1_1.1 91.44,40.386 85.217,40.386 ; pad.2@98.995,-58.547 98.995,-66.349 99.067,-66.421 R1_1_1.2 ; pad.2@98.995,27.305 98.995,19.503 99.067,19.431 R1_1_1_1.2 ; pad.2@99.06,-76.2 R2_1_1.2 ; pad.2@99.06,9.652 R2_1_1_1.2 ; pad.2@102.997,-13.97 105.41,-13.97 H1_1_1.1 ; pad.2@102.997,71.882 105.41,71.882 H1_1_1_1.1 ; 2.159,-29.083 2.159,-45.466 6.096,-45.466 ; 2.159,56.769 2.159,40.386 6.096,40.386 ; 41.529,-29.083 41.529,-45.466 45.466,-45.466 ; 41.529,56.769 41.529,40.386 45.466,40.386 ; 81.28,-29.083 81.28,-45.466 85.217,-45.466 ; 81.28,56.769 81.28,40.386 85.217,40.386
GND: C1.1 C1_1.1 C1_1_1.1 C1_1_1_1.1 C1_1_2.1 C1_2.1 C2.1 C2_1.1 C2_1_1.1 C2_1_1_1.1 C2_1_2.1 C2_2.1 C3.1 C3_1.1 C3_1_1.1 C3_1_1_1.1 C3_1_2.1 C3_2.1 C4.2 C4_1.2 C4_1_1.2 C4_1_1_1.2 C4_1_2.2 C4_2.2 C5.1 C5_1.1 C5_1_1.1 C5_1_1_1.1 C5_1_2.1 C5_2.1 C6.1 C6_1.1 C6_1_1.1 C6_1_1_1.1 C6_1_2.1 C6_2.1 C7.1 C7_1.1 C7_1_1.1 C7_1_1_1.1 C7_1_2.1 C7_2.1 C8.1 C8_1.1 C8_1_1.1 C8_1_1_1.1 C8_1_2.1 C8_2.1 H1.2 H1_1.2 H1_1_1.2 H1_1_1_1.2 H1_1_2.2 H1_2.2 H2.4 H2_1.4 H2_1_1.4 H2_1_1_1.4 H2_1_2.4 H2_2.4 H3.1 H3_1.1 H3_1_1.1 H3_1_1_1.1 H3_1_2.1 H3_2.1 K1.2 K1_1.2 K1_1_1.2 K1_1_1_1.2 K1_1_2.2 K1_2.2 K2.2 K2.4 K2_1.2 K2_1.4 K2_1_1.2 K2_1_1.4 K2_1_1_1.2 K2_1_1_1.4 K2_1_2.2 K2_1_2.4 K2_2.2 K2_2.4 pad.2@11.303,49.149 pad.2@11.303,-36.703 pad.2@20.447,49.149 pad.2@20.447,-36.703 pad.2@50.673,49.149 pad.2@50.673,-36.703 pad.2@59.817,49.149 pad.2@59.817,-36.703 pad.2@90.424,49.149 pad.2@90.424,-36.703 pad.2@99.568,49.149 pad.2@99.568,-36.703 R5.2 R5_1.2 R5_1_1.2 R5_1_1_1.2 R5_1_2.2 R5_2.2 U1.1 U1_1.1 U1_1_1.1 U1_1_1_1.1 U1_1_2.1 U1_2.1 U2.1 U2.15 U2_1.1 U2_1.15 U2_1_1.1 U2_1_1.15 U2_1_1_1.1 U2_1_1_1.15 U2_1_2.1 U2_1_2.15 U2_2.1 U2_2.15 Y1.2 Y1_1.2 Y1_1_1.2 Y1_1_1_1.2 Y1_1_2.2 Y1_2.2 | length 2019
  Top Layer w0.254: 12.954,-24.737 13.081,-24.737 12.944,-24.874 12.944,-26.345 U2.15 ; 12.954,61.115 13.081,61.115 12.944,60.978 12.944,59.507 U2_2.15 ; 52.324,-24.737 52.451,-24.737 52.314,-24.874 52.314,-26.345 U2_1.15 ; 52.324,61.115 52.451,61.115 52.314,60.978 52.314,59.507 U2_1_2.15 ; 92.075,-24.737 92.202,-24.737 92.065,-24.874 92.065,-26.345 U2_1_1.15 ; 92.075,61.115 92.202,61.115 92.065,60.978 92.065,59.507 U2_1_1_1.15
  Top Layer w0.6: 7.25,-50.006 7.25,-47.498 ; 7.25,35.846 7.25,38.354 ; 46.62,-50.006 46.62,-47.498 ; 46.62,35.846 46.62,38.354 ; 86.371,-50.006 86.371,-47.498 ; 86.371,35.846 86.371,38.354
  Top Layer w0.8: U1.1 3.806,-50.673 5.055,-50.673 5.055,-51.308 ; U1_2.1 3.806,35.179 5.055,35.179 5.055,34.544 ; C2.1 6,-39.751 H2.4 pad.2@11.303,-36.703 ; C2_2.1 6,46.101 H2_2.4 pad.2@11.303,49.149 ; C1.1@4.942,-53.086 0.889,-53.086 0.889,-16.891 H3.1 ; C1_2.1@4.942,32.766 0.889,32.766 0.889,68.961 H3_2.1 ; C1.1 5.055,-51.308 ; C1_2.1 5.055,34.544 ; 7.207,-50.049 7.207,-51.308 5.055,-51.308 ; 7.207,35.803 7.207,34.544 5.055,34.544 ; 7.25,-47.498 7.25,-46.62 9.906,-46.62 C6.1 7.62,-61.189 7.62,-68.62 K2.4 2.032,-68.62 2.032,-75.565 10.547,-75.565 10.547,-74.422 14.345,-74.422 ; 7.25,38.354 7.25,39.232 9.906,39.232 C6_2.1 7.62,24.663 7.62,17.232 K2_2.4 2.032,17.232 2.032,10.287 10.547,10.287 10.547,11.43 14.345,11.43 ; C3.1@11.303,-24.737 12.954,-24.737 ; C3_2.1@11.303,61.115 12.954,61.115 ; 13.081,-24.737 13.081,-16.891 H3.1 ; 13.081,61.115 13.081,68.961 H3_2.1 ; 14.351,-74.422 16.714,-74.422 16.714,-71.12 ; 14.351,11.43 16.714,11.43 16.714,14.732 ; 20.421,-29.845 C4.2 20.421,-33.909 ; 20.421,56.007 C4_2.2 20.421,51.943 ; pad.2@20.447,-36.703 16.714,-36.703 ; pad.2@20.447,49.149 16.714,49.149 ; H1.2 23.749,-1.016 ; H1_2.2 23.749,84.836 ; C7.1 24.086,-71.966 21.59,-71.966 21.59,-71.12 ; C8.1 21.59,-70.333 21.59,-71.12 ; C7_2.1 24.086,13.886 21.59,13.886 21.59,14.732 ; C8_2.1 21.59,15.519 21.59,14.732 ; Y1.2 24.13,-33.909 20.421,-33.909 ; Y1_2.2 24.13,51.943 20.421,51.943 ; R5.2 30.086,-59.563 33.274,-59.563 ; R5_2.2 30.086,26.289 33.274,26.289 ; K1.2 33.274,-69.469 33.274,-66.548 ; K1_2.2 33.274,16.383 33.274,19.304 ; C5.1 33.274,-66.548 ; C5_2.1 33.274,19.304 ; U1_1.1 43.176,-50.673 44.425,-50.673 44.425,-51.308 ; U1_1_2.1 43.176,35.179 44.425,35.179 44.425,34.544 ; C2_1.1 45.37,-39.751 H2_1.4 pad.2@50.673,-36.703 ; C2_1_2.1 45.37,46.101 H2_1_2.4 pad.2@50.673,49.149 ; C1_1.1@44.312,-53.086 40.259,-53.086 40.259,-16.891 H3_1.1 ; C1_1_2.1@44.312,32.766 40.259,32.766 40.259,68.961 H3_1_2.1 ; C1_1.1 44.425,-51.308 ; C1_1_2.1 44.425,34.544 ; 46.577,-50.049 46.577,-51.308 44.425,-51.308 ; 46.577,35.803 46.577,34.544 44.425,34.544 ; 46.62,-47.498 46.62,-46.62 49.276,-46.62 C6_1.1 46.99,-61.189 46.99,-68.62 K2_1.4 41.402,-68.62 41.402,-75.565 49.917,-75.565 49.917,-74.422 53.715,-74.422 ; 46.62,38.354 46.62,39.232 49.276,39.232 C6_1_2.1 46.99,24.663 46.99,17.232 K2_1_2.4 41.402,17.232 41.402,10.287 49.917,10.287 49.917,11.43 53.715,11.43 ; C3_1.1@50.673,-24.737 52.324,-24.737 ; C3_1_2.1@50.673,61.115 52.324,61.115 ; 52.451,-24.737 52.451,-16.891 H3_1.1 ; 52.451,61.115 52.451,68.961 H3_1_2.1 ; 53.721,-74.422 56.084,-74.422 56.084,-71.12 ; 53.721,11.43 56.084,11.43 56.084,14.732 ; 59.791,-29.845 C4_1.2 59.791,-33.909 ; 59.791,56.007 C4_1_2.2 59.791,51.943 ; pad.2@59.817,-36.703 56.084,-36.703 ; pad.2@59.817,49.149 56.084,49.149 ; H1_1.2 63.119,-1.016 ; H1_1_2.2 63.119,84.836 ; C7_1.1 63.456,-71.966 60.96,-71.966 60.96,-71.12 ; C8_1.1 60.96,-70.333 60.96,-71.12 ; C7_1_2.1 63.456,13.886 60.96,13.886 60.96,14.732 ; C8_1_2.1 60.96,15.519 60.96,14.732 ; Y1_1.2 63.5,-33.909 59.791,-33.909 ; Y1_1_2.2 63.5,51.943 59.791,51.943 ; R5_1.2 69.456,-59.563 72.644,-59.563 ; R5_1_2.2 69.456,26.289 72.644,26.289 ; K1_1.2 72.644,-69.469 72.644,-66.548 ; K1_1_2.2 72.644,16.383 72.644,19.304 ; C5_1.1 72.644,-66.548 ; C5_1_2.1 72.644,19.304 ; U1_1_1.1 82.927,-50.673 84.176,-50.673 84.176,-51.308 ; U1_1_1_1.1 82.927,35.179 84.176,35.179 84.176,34.544 ; C2_1_1.1 85.121,-39.751 H2_1_1.4 pad.2@90.424,-36.703 ; C2_1_1_1.1 85.121,46.101 H2_1_1_1.4 pad.2@90.424,49.149 ; C1_1_1.1@84.063,-53.086 80.01,-53.086 80.01,-16.891 H3_1_1.1 ; C1_1_1_1.1@84.063,32.766 80.01,32.766 80.01,68.961 H3_1_1_1.1 ; C1_1_1.1 84.176,-51.308 ; C1_1_1_1.1 84.176,34.544 ; 86.328,-50.049 86.328,-51.308 84.176,-51.308 ; 86.328,35.803 86.328,34.544 84.176,34.544 ; 86.371,-47.498 86.371,-46.62 89.027,-46.62 C6_1_1.1 86.741,-61.189 86.741,-68.62 K2_1_1.4 81.153,-68.62 81.153,-75.565 89.668,-75.565 89.668,-74.422 93.466,-74.422 ; 86.371,38.354 86.371,39.232 89.027,39.232 C6_1_1_1.1 86.741,24.663 86.741,17.232 K2_1_1_1.4 81.153,17.232 81.153,10.287 89.668,10.287 89.668,11.43 93.466,11.43 ; C3_1_1.1@90.424,-24.737 92.075,-24.737 ; C3_1_1_1.1@90.424,61.115 92.075,61.115 ; 92.202,-24.737 92.202,-16.891 H3_1_1.1 ; 92.202,61.115 92.202,68.961 H3_1_1_1.1 ; 93.472,-74.422 95.835,-74.422 95.835,-71.12 ; 93.472,11.43 95.835,11.43 95.835,14.732 ; 99.542,-29.845 C4_1_1.2 99.542,-33.909 ; 99.542,56.007 C4_1_1_1.2 99.542,51.943 ; pad.2@99.568,-36.703 95.835,-36.703 ; pad.2@99.568,49.149 95.835,49.149 ; H1_1_1.2 102.87,-1.016 ; H1_1_1_1.2 102.87,84.836 ; C7_1_1.1 103.207,-71.966 100.711,-71.966 100.711,-71.12 ; C8_1_1.1 100.711,-70.333 100.711,-71.12 ; C7_1_1_1.1 103.207,13.886 100.711,13.886 100.711,14.732 ; C8_1_1_1.1 100.711,15.519 100.711,14.732 ; Y1_1_1.2 103.251,-33.909 99.542,-33.909 ; Y1_1_1_1.2 103.251,51.943 99.542,51.943 ; R5_1_1.2 109.207,-59.563 112.395,-59.563 ; R5_1_1_1.2 109.207,26.289 112.395,26.289 ; K1_1_1.2 112.395,-69.469 112.395,-66.548 ; K1_1_1_1.2 112.395,16.383 112.395,19.304 ; C5_1_1.1 112.395,-66.548 ; C5_1_1_1.1 112.395,19.304 ; H3.1 6,-1.016 23.749,-1.016 ; H3_2.1 6,84.836 23.749,84.836 ; 16.714,-71.12 16.714,-36.703 ; 16.714,-71.12 K2.2 21.59,-71.12 ; 16.714,-36.703 16.714,-33.909 20.421,-33.909 ; 16.714,14.732 K2_2.2 21.59,14.732 ; 16.714,14.732 16.714,49.149 ; 16.714,49.149 16.714,51.943 20.421,51.943 ; 23.749,-1.016 33.274,-1.016 33.274,-59.563 ; 23.749,84.836 33.274,84.836 33.274,26.289 ; 33.274,-66.548 33.274,-59.563 ; 33.274,19.304 33.274,26.289 ; H3_1.1 45.37,-1.016 63.119,-1.016 ; H3_1_2.1 45.37,84.836 63.119,84.836 ; 56.084,-71.12 K2_1.2 60.96,-71.12 ; 56.084,-71.12 56.084,-36.703 ; 56.084,-36.703 56.084,-33.909 59.791,-33.909 ; 56.084,14.732 56.084,49.149 ; 56.084,14.732 K2_1_2.2 60.96,14.732 ; 56.084,49.149 56.084,51.943 59.791,51.943 ; 63.119,-1.016 72.644,-1.016 72.644,-59.563 ; 63.119,84.836 72.644,84.836 72.644,26.289 ; 72.644,-66.548 72.644,-59.563 ; 72.644,19.304 72.644,26.289 ; H3_1_1.1 85.121,-1.016 102.87,-1.016 ; H3_1_1_1.1 85.121,84.836 102.87,84.836 ; 95.835,-71.12 95.835,-36.703 ; 95.835,-71.12 K2_1_1.2 100.711,-71.12 ; 95.835,-36.703 95.835,-33.909 99.542,-33.909 ; 95.835,14.732 K2_1_1_1.2 100.711,14.732 ; 95.835,14.732 95.835,49.149 ; 95.835,49.149 95.835,51.943 99.542,51.943 ; 102.87,-1.016 112.395,-1.016 112.395,-59.563 ; 102.87,84.836 112.395,84.836 112.395,26.289 ; 112.395,-66.548 112.395,-59.563 ; 112.395,19.304 112.395,26.289
lcd_a0: H1.5 H1_1.5 H1_1_1.5 H1_1_1_1.5 H1_1_2.5 H1_2.5 U2.10 U2_1.10 U2_1_1.10 U2_1_1_1.10 U2_1_2.10 U2_2.10 | length 160.2
  Top Layer w0.254: H1.5 16.129,-5.969 20.574,-5.969 20.574,-6.858 21.463,-6.858 21.463,-23.745 U2.10 ; H1_2.5 16.129,79.883 20.574,79.883 20.574,78.994 21.463,78.994 21.463,62.107 U2_2.10 ; H1_1.5 55.499,-5.969 59.944,-5.969 59.944,-6.858 60.833,-6.858 60.833,-23.745 U2_1.10 ; H1_1_2.5 55.499,79.883 59.944,79.883 59.944,78.994 60.833,78.994 60.833,62.107 U2_1_2.10 ; H1_1_1.5 95.25,-5.969 99.695,-5.969 99.695,-6.858 100.584,-6.858 100.584,-23.745 U2_1_1.10 ; H1_1_1_1.5 95.25,79.883 99.695,79.883 99.695,78.994 100.584,78.994 100.584,62.107 U2_1_1_1.10
lcd_rs: H1.3 H1_1.3 H1_1_1.3 H1_1_1_1.3 H1_1_2.3 H1_2.3 U2.9 U2_1.9 U2_1_1.9 U2_1_1_1.9 U2_1_2.9 U2_2.9 | length 139.7
  Top Layer w0.254: U2.9 21.971,-24.395 21.971,-6.096 21.209,-6.096 H1.3 ; U2_2.9 21.971,61.457 21.971,79.756 21.209,79.756 H1_2.3 ; U2_1.9 61.341,-24.395 61.341,-6.096 60.579,-6.096 H1_1.3 ; U2_1_2.9 61.341,61.457 61.341,79.756 60.579,79.756 H1_1_2.3 ; U2_1_1.9 101.092,-24.395 101.092,-6.096 100.33,-6.096 H1_1_1.3 ; U2_1_1_1.9 101.092,61.457 101.092,79.756 100.33,79.756 H1_1_1_1.3
lcd_rst: 
lcd_sck: H1.7 H1_1.7 H1_1_1.7 H1_1_1_1.7 H1_1_2.7 H1_2.7 U2.11 U2_1.11 U2_1_1.11 U2_1_1_1.11 U2_1_2.11 U2_2.11 | length 158.6
  Top Layer w0.254: H1.7 11.049,-9.017 15.875,-9.017 15.875,-23.745 U2.11 ; H1_2.7 11.049,76.835 15.875,76.835 15.875,62.107 U2_2.11 ; H1_1.7 50.419,-9.017 55.245,-9.017 55.245,-23.745 U2_1.11 ; H1_1_2.7 50.419,76.835 55.245,76.835 55.245,62.107 U2_1_2.11 ; H1_1_1.7 90.17,-9.017 94.996,-9.017 94.996,-23.745 U2_1_1.11 ; H1_1_1_1.7 90.17,76.835 94.996,76.835 94.996,62.107 U2_1_1_1.11
lcd_sda: H1.6 H1_1.6 H1_1_1.6 H1_1_1_1.6 H1_1_2.6 H1_2.6 U2.13 U2_1.13 U2_1_1.13 U2_1_1_1.13 U2_1_2.13 U2_2.13 | length 158.8
  Top Layer w0.254: H1.6 13.589,-8.255 16.51,-8.255 16.51,-25.045 U2.13 ; H1_2.6 13.589,77.597 16.51,77.597 16.51,60.807 U2_2.13 ; H1_1.6 52.959,-8.255 55.88,-8.255 55.88,-25.045 U2_1.13 ; H1_1_2.6 52.959,77.597 55.88,77.597 55.88,60.807 U2_1_2.13 ; H1_1_1.6 92.71,-8.255 95.631,-8.255 95.631,-25.045 U2_1_1.13 ; H1_1_1_1.6 92.71,77.597 95.631,77.597 95.631,60.807 U2_1_1_1.13
miso: U2.12 U2_1.12 U2_1_1.12 U2_1_1_1.12 U2_1_2.12 U2_2.12
NetC5_2: C5.2 C5_1.2 C5_1_1.2 C5_1_1_1.2 C5_1_2.2 C5_2.2 K1.1 K1_1.1 K1_1_1.1 K1_1_1_1.1 K1_1_2.1 K1_2.1 pad.2@23.876,58.207 pad.2@23.876,61.595 pad.2@23.876,-24.257 pad.2@23.876,-27.645 pad.2@63.246,58.207 pad.2@63.246,61.595 pad.2@63.246,-24.257 pad.2@63.246,-27.645 pad.2@102.997,58.207 pad.2@102.997,61.595 pad.2@102.997,-24.257 pad.2@102.997,-27.645 U2.4 U2_1.4 U2_1_1.4 U2_1_1_1.4 U2_1_2.4 U2_2.4 | length 383.4
  Top Layer w0.254: U2.4 pad.2@23.876,-27.645 ; U2_2.4 pad.2@23.876,58.207 ; pad.2@23.876,-24.257 27.94,-24.257 27.94,-66.548 C5.2 30.086,-68.338 29.464,-68.338 29.464,-76.327 K1.1 ; pad.2@23.876,61.595 27.94,61.595 27.94,19.304 C5_2.2 30.086,17.514 29.464,17.514 29.464,9.525 K1_2.1 ; U2_1.4 pad.2@63.246,-27.645 ; U2_1_2.4 pad.2@63.246,58.207 ; pad.2@63.246,-24.257 67.31,-24.257 67.31,-66.548 C5_1.2 69.456,-68.338 68.834,-68.338 68.834,-76.327 K1_1.1 ; pad.2@63.246,61.595 67.31,61.595 67.31,19.304 C5_1_2.2 69.456,17.514 68.834,17.514 68.834,9.525 K1_1_2.1 ; U2_1_1.4 pad.2@102.997,-27.645 ; U2_1_1_1.4 pad.2@102.997,58.207 ; pad.2@102.997,-24.257 107.061,-24.257 107.061,-66.548 C5_1_1.2 109.207,-68.338 108.585,-68.338 108.585,-76.327 K1_1_1.1 ; pad.2@102.997,61.595 107.061,61.595 107.061,19.304 C5_1_1_1.2 109.207,17.514 108.585,17.514 108.585,9.525 K1_1_1_1.1
NetD1_1: D1.1 D1_1.1 D1_1_1.1 D1_1_1_1.1 D1_1_2.1 D1_2.1 pad.2@18.542,64.135 pad.2@18.542,-21.717 pad.2@23.876,64.135 pad.2@23.876,-21.717 pad.2@57.912,64.135 pad.2@57.912,-21.717 pad.2@63.246,64.135 pad.2@63.246,-21.717 pad.2@97.663,64.135 pad.2@97.663,-21.717 pad.2@102.997,64.135 pad.2@102.997,-21.717 U2.14 U2_1.14 U2_1_1.14 U2_1_1_1.14 U2_1_2.14 U2_2.14 | length 340.9
  Top Layer w0.254: U2.14 17.018,-25.695 17.018,-21.717 pad.2@18.542,-21.717 ; U2_2.14 17.018,60.157 17.018,64.135 pad.2@18.542,64.135 ; pad.2@23.876,-21.717 28.448,-21.717 28.448,-64.389 D1.1 ; pad.2@23.876,64.135 28.448,64.135 28.448,21.463 D1_2.1 ; U2_1.14 56.388,-25.695 56.388,-21.717 pad.2@57.912,-21.717 ; U2_1_2.14 56.388,60.157 56.388,64.135 pad.2@57.912,64.135 ; pad.2@63.246,-21.717 67.818,-21.717 67.818,-64.389 D1_1.1 ; pad.2@63.246,64.135 67.818,64.135 67.818,21.463 D1_1_2.1 ; U2_1_1.14 96.139,-25.695 96.139,-21.717 pad.2@97.663,-21.717 ; U2_1_1_1.14 96.139,60.157 96.139,64.135 pad.2@97.663,64.135 ; pad.2@102.997,-21.717 107.569,-21.717 107.569,-64.389 D1_1_1.1 ; pad.2@102.997,64.135 107.569,64.135 107.569,21.463 D1_1_1_1.1
NetD1_2: D1.2 D1_1.2 D1_1_1.2 D1_1_1_1.2 D1_1_2.2 D1_2.2 R5.1 R5_1.1 R5_1_1.1 R5_1_1_1.1 R5_1_2.1 R5_2.1 | length 13.7
  Top Layer w0.254: D1.2 R5.1 ; D1_2.2 R5_2.1 ; D1_1.2 R5_1.1 ; D1_1_2.2 R5_1_2.1 ; D1_1_1.2 R5_1_1.1 ; D1_1_1_1.2 R5_1_1_1.1
NetH2_2: H2.2 H2_1.2 H2_1_1.2 H2_1_1_1.2 H2_1_2.2 H2_2.2 U2.19 U2_1.19 U2_1_1.19 U2_1_1_1.19 U2_1_2.19 U2_2.19 | length 67.5
  Top Layer w0.254: H2.2 8.763,-31.623 8.763,-28.945 U2.19 ; H2_2.2 8.763,54.229 8.763,56.907 U2_2.19 ; H2_1.2 48.133,-31.623 48.133,-28.945 U2_1.19 ; H2_1_2.2 48.133,54.229 48.133,56.907 U2_1_2.19 ; H2_1_1.2 87.884,-31.623 87.884,-28.945 U2_1_1.19 ; H2_1_1_1.2 87.884,54.229 87.884,56.907 U2_1_1_1.19
NetH2_3: H2.3 H2_1.3 H2_1_1.3 H2_1_1_1.3 H2_1_2.3 H2_2.3 U2.20 U2_1.20 U2_1_1.20 U2_1_1_1.20 U2_1_2.20 U2_2.20 | length 78.9
  Top Layer w0.254: H2.3 9.398,-34.163 9.398,-29.595 U2.20 ; H2_2.3 9.398,51.689 9.398,56.257 U2_2.20 ; H2_1.3 48.768,-34.163 48.768,-29.595 U2_1.20 ; H2_1_2.3 48.768,51.689 48.768,56.257 U2_1_2.20 ; H2_1_1.3 88.519,-34.163 88.519,-29.595 U2_1_1.20 ; H2_1_1_1.3 88.519,51.689 88.519,56.257 U2_1_1_1.20
NetH3_3: H3.3 H3_1.3 H3_1_1.3 H3_1_1_1.3 H3_1_2.3 H3_2.3 U2.17 U2_1.17 U2_1_1.17 U2_1_1_1.17 U2_1_2.17 U2_2.17 | length 85.5
  Top Layer w0.254: H3.3 9.398,-21.971 9.398,-27.645 U2.17 ; H3_2.3 9.398,63.881 9.398,58.207 U2_2.17 ; H3_1.3 48.768,-21.971 48.768,-27.645 U2_1.17 ; H3_1_2.3 48.768,63.881 48.768,58.207 U2_1_2.17 ; H3_1_1.3 88.519,-21.971 88.519,-27.645 U2_1_1.17 ; H3_1_1_1.3 88.519,63.881 88.519,58.207 U2_1_1_1.17
NetH3_4: H3.4 H3_1.4 H3_1_1.4 H3_1_1_1.4 H3_1_2.4 H3_2.4 U2.18 U2_1.18 U2_1_1.18 U2_1_1_1.18 U2_1_2.18 U2_2.18 | length 74.2
  Top Layer w0.254: H3.4 8.89,-24.511 8.89,-28.295 U2.18 ; H3_2.4 8.89,61.341 8.89,57.557 U2_2.18 ; H3_1.4 48.26,-24.511 48.26,-28.295 U2_1.18 ; H3_1_2.4 48.26,61.341 48.26,57.557 U2_1_2.18 ; H3_1_1.4 88.011,-24.511 88.011,-28.295 U2_1_1.18 ; H3_1_1_1.4 88.011,61.341 88.011,57.557 U2_1_1_1.18
NetK2_1: K2.1 K2_1.1 K2_1_1.1 K2_1_1_1.1 K2_1_2.1 K2_2.1 R2.1 R2_1.1 R2_1_1.1 R2_1_1_1.1 R2_1_2.1 R2_2.1 R4.2 R4_1.2 R4_1_1.2 R4_1_1_1.2 R4_1_2.2 R4_2.2 | length 51.3
  Top Layer w0.254: K2.1 22.225,-73.62 22.225,-74.244 R4.2 25.033,-74.244 25.033,-76.2 R2.1 ; K2_2.1 22.225,12.232 22.225,11.608 R4_2.2 25.033,11.608 25.033,9.652 R2_2.1 ; K2_1.1 61.595,-73.62 61.595,-74.244 R4_1.2 64.403,-74.244 64.403,-76.2 R2_1.1 ; K2_1_2.1 61.595,12.232 61.595,11.608 R4_1_2.2 64.403,11.608 64.403,9.652 R2_1_2.1 ; K2_1_1.1 101.346,-73.62 101.346,-74.244 R4_1_1.2 104.154,-74.244 104.154,-76.2 R2_1_1.1 ; K2_1_1_1.1 101.346,12.232 101.346,11.608 R4_1_1_1.2 104.154,11.608 104.154,9.652 R2_1_1_1.1
NetK2_3: K2.3 K2_1.3 K2_1_1.3 K2_1_1_1.3 K2_1_2.3 K2_2.3 R1.1 R1_1.1 R1_1_1.1 R1_1_1_1.1 R1_1_2.1 R1_2.1 R6.2 R6_1.2 R6_1_1.2 R6_1_1_1.2 R6_1_2.2 R6_2.2 | length 50.2
  Top Layer w0.254: K2.3 19.946,-68.707 22.098,-68.707 22.098,-68.377 R6.2 24.986,-68.377 24.986,-66.421 R1.1 ; K2_2.3 19.946,17.145 22.098,17.145 22.098,17.475 R6_2.2 24.986,17.475 24.986,19.431 R1_2.1 ; K2_1.3 59.316,-68.707 61.468,-68.707 61.468,-68.377 R6_1.2 64.356,-68.377 64.356,-66.421 R1_1.1 ; K2_1_2.3 59.316,17.145 61.468,17.145 61.468,17.475 R6_1_2.2 64.356,17.475 64.356,19.431 R1_1_2.1 ; K2_1_1.3 99.067,-68.707 101.219,-68.707 101.219,-68.377 R6_1_1.2 104.107,-68.377 104.107,-66.421 R1_1_1.1 ; K2_1_1_1.3 99.067,17.145 101.219,17.145 101.219,17.475 R6_1_1_1.2 104.107,17.475 104.107,19.431 R1_1_1_1.1
NetU2_2: U2.2 U2_1.2 U2_1_1.2 U2_1_1_1.2 U2_1_2.2 U2_2.2 Y1.1 Y1_1.1 Y1_1_1.1 Y1_1_1_1.1 Y1_1_2.1 Y1_2.1 | length 28.6
  Top Layer w0.254: U2.2 22.122,-28.945 22.122,-29.591 22.63,-29.591 Y1.1 ; U2_2.2 22.122,56.907 22.122,56.261 22.63,56.261 Y1_2.1 ; U2_1.2 61.492,-28.945 61.492,-29.591 62,-29.591 Y1_1.1 ; U2_1_2.2 61.492,56.907 61.492,56.261 62,56.261 Y1_1_2.1 ; U2_1_1.2 101.243,-28.945 101.243,-29.591 101.751,-29.591 Y1_1_1.1 ; U2_1_1_1.2 101.243,56.907 101.243,56.261 101.751,56.261 Y1_1_1_1.1
NetU2_3: U2.3 U2_1.3 U2_1_1.3 U2_1_1_1.3 U2_1_2.3 U2_2.3 Y1.3 Y1_1.3 Y1_1_1.3 Y1_1_1_1.3 Y1_1_2.3 Y1_2.3 | length 50.5
  Top Layer w0.254: U2.3 22.63,-28.295 22.63,-29.083 25.63,-29.083 Y1.3 ; U2_2.3 22.63,57.557 22.63,56.769 25.63,56.769 Y1_2.3 ; U2_1.3 62,-28.295 62,-29.083 65,-29.083 Y1_1.3 ; U2_1_2.3 62,57.557 62,56.769 65,56.769 Y1_1_2.3 ; U2_1_1.3 101.751,-28.295 101.751,-29.083 104.751,-29.083 Y1_1_1.3 ; U2_1_1_1.3 101.751,57.557 101.751,56.769 104.751,56.769 Y1_1_1_1.3
PA0: C8.2 C8_1.2 C8_1_1.2 C8_1_1_1.2 C8_1_2.2 C8_2.2 R6.1 R6_1.1 R6_1_1.1 R6_1_1_1.1 R6_1_2.1 R6_2.1 U2.6 U2_1.6 U2_1_1.6 U2_1_1_1.6 U2_1_2.6 U2_2.6 | length 309
  Top Layer w0.254: U2.6 26.924,-26.345 26.924,-68.377 R6.1 C8.2 ; U2_2.6 26.924,59.507 26.924,17.475 R6_2.1 C8_2.2 ; U2_1.6 66.294,-26.345 66.294,-68.377 R6_1.1 C8_1.2 ; U2_1_2.6 66.294,59.507 66.294,17.475 R6_1_2.1 C8_1_2.2 ; U2_1_1.6 106.045,-26.345 106.045,-68.377 R6_1_1.1 C8_1_1.2 ; U2_1_1_1.6 106.045,59.507 106.045,17.475 R6_1_1_1.1 C8_1_1_1.2
PA1: C7.2 C7_1.2 C7_1_1.2 C7_1_1_1.2 C7_1_2.2 C7_2.2 R4.1 R4_1.1 R4_1_1.1 R4_1_1_1.1 R4_1_2.1 R4_2.1 U2.7 U2_1.7 U2_1_1.7 U2_1_1_1.7 U2_1_2.7 U2_2.7 | length 342.5
  Top Layer w0.254: U2.7 27.432,-25.695 27.432,-72.288 C7.2 R4.1 ; U2_2.7 27.432,60.157 27.432,13.564 C7_2.2 R4_2.1 ; U2_1.7 66.802,-25.695 66.802,-72.288 C7_1.2 R4_1.1 ; U2_1_2.7 66.802,60.157 66.802,13.564 C7_1_2.2 R4_1_2.1 ; U2_1_1.7 106.553,-25.695 106.553,-72.288 C7_1_1.2 R4_1_1.1 ; U2_1_1_1.7 106.553,60.157 106.553,13.564 C7_1_1_1.2 R4_1_1_1.1
PA4: C6.2 C6_1.2 C6_1_1.2 C6_1_1_1.2 C6_1_2.2 C6_2.2 K2.5 K2_1.5 K2_1_1.5 K2_1_1_1.5 K2_1_2.5 K2_2.5 R3.2 R3_1.2 R3_1_1.2 R3_1_1_1.2 R3_1_2.2 R3_2.2 U2.8 U2_1.8 U2_1_1.8 U2_1_1_1.8 U2_1_2.8 U2_2.8 | length 381.3
  Top Layer w0.254: K2.5 9.906,-73.62 C6.2 15.875,-63.017 15.875,-62.992 15.875,-30.099 18.084,-30.099 18.084,-26.416 19.177,-26.416 19.177,-25.045 U2.8 ; K2_2.5 9.906,12.232 C6_2.2 15.875,22.835 15.875,22.86 15.875,55.753 18.084,55.753 18.084,59.436 19.177,59.436 19.177,60.807 U2_2.8 ; K2_1.5 49.276,-73.62 C6_1.2 55.245,-63.017 55.245,-62.992 55.245,-30.099 57.454,-30.099 57.454,-26.416 58.547,-26.416 58.547,-25.045 U2_1.8 ; K2_1_2.5 49.276,12.232 C6_1_2.2 55.245,22.835 55.245,22.86 55.245,55.753 57.454,55.753 57.454,59.436 58.547,59.436 58.547,60.807 U2_1_2.8 ; K2_1_1.5 89.027,-73.62 C6_1_1.2 94.996,-63.017 94.996,-62.992 94.996,-30.099 97.205,-30.099 97.205,-26.416 98.298,-26.416 98.298,-25.045 U2_1_1.8 ; K2_1_1_1.5 89.027,12.232 C6_1_1_1.2 94.996,22.835 94.996,22.86 94.996,55.753 97.205,55.753 97.205,59.436 98.298,59.436 98.298,60.807 U2_1_1_1.8
VCC: C1.2 C1_1.2 C1_1_1.2 C1_1_1_1.2 C1_1_2.2 C1_2.2 U1.3 U1_1.3 U1_1_1.3 U1_1_1_1.3 U1_1_2.3 U1_2.3 | length 88.4
  Top Layer w1: 1.143,-56.388 6.883,-56.388 C1.2 8.386,-53.086 U1.3 ; 1.143,29.464 6.883,29.464 C1_2.2 8.386,32.766 U1_2.3 ; 40.513,-56.388 46.253,-56.388 C1_1.2 47.756,-53.086 U1_1.3 ; 40.513,29.464 46.253,29.464 C1_1_2.2 47.756,32.766 U1_1_2.3 ; 80.264,-56.388 86.004,-56.388 C1_1_1.2 87.507,-53.086 U1_1_1.3 ; 80.264,29.464 86.004,29.464 C1_1_1_1.2 87.507,32.766 U1_1_1_1.3
pads on no net: H1.4 H1_1.4 H1_1_1.4 H1_1_1_1.4 H1_1_2.4 H1_2.4 K2.0 K2_1.0 K2_1_1.0 K2_1_1_1.0 K2_1_2.0 K2_2.0 U1.4 U1_1.4 U1_1_1.4 U1_1_1_1.4 U1_1_2.4 U1_2.4
copper on no net: | length 33
  Top Layer w0.254: 5.207,-60.579 5.715,-60.071 ; 5.207,25.273 5.715,25.781 ; 5.715,-64.135 5.715,-60.071 ; 5.715,21.717 5.715,25.781 ; 6.223,-60.579 5.715,-60.071 ; 6.223,25.273 5.715,25.781 ; 44.577,-60.579 45.085,-60.071 ; 44.577,25.273 45.085,25.781 ; 45.085,-64.135 45.085,-60.071 ; 45.085,21.717 45.085,25.781 ; 45.593,-60.579 45.085,-60.071 ; 45.593,25.273 45.085,25.781 ; 84.328,-60.579 84.836,-60.071 ; 84.328,25.273 84.836,25.781 ; 84.836,-64.135 84.836,-60.071 ; 84.836,21.717 84.836,25.781 ; 85.344,-60.579 84.836,-60.071 ; 85.344,25.273 84.836,25.781

## Keep-outs
Top Layer:
  lines w0.254: 39.37,-80.137 74.295,-80.137 74.295,0 39.37,0 39.37,-80.137 ; 39.37,5.715 39.37,85.852 74.295,85.852 74.295,5.715 39.37,5.715 ; 79.121,-80.137 79.121,0 114.046,0 114.046,-80.137 79.121,-80.137 ; 79.121,5.715 114.046,5.715 114.046,85.852 79.121,85.852 79.121,5.715
Keep-Out Layer:
  lines w0.254: 0,-80.137 34.925,-80.137 34.925,0 0,0 0,-80.137 ; 0,5.715 34.925,5.715 34.925,85.852 0,85.852 0,5.715 ; 39.37,-80.137 74.295,-80.137 74.295,0 39.37,0 39.37,-80.137 ; 39.37,5.715 39.37,85.852 74.295,85.852 74.295,5.715 39.37,5.715 ; 79.121,-80.137 79.121,0 114.046,0 114.046,-80.137 79.121,-80.137 ; 79.121,5.715 114.046,5.715 114.046,85.852 79.121,85.852 79.121,5.715

## Other copper
Top Layer:
  rectangle net GND: 0.508,31.369 4.064,34.417
  rectangle net VCC: 0.508,27.559 4.064,30.226
  rectangle net VCC: 39.878,27.559 43.434,30.226
  rectangle net GND: 39.878,31.369 43.434,34.417
  rectangle net VCC: 39.878,27.559 43.434,30.226
  rectangle net GND: 39.878,31.369 43.434,34.417
  rectangle net GND: 79.629,31.369 83.185,34.417
  rectangle net VCC: 79.629,27.559 83.185,30.226
  rectangle net GND: 79.629,31.369 83.185,34.417
  rectangle net VCC: 79.629,27.559 83.185,30.226
  rectangle net VCC: 79.629,-58.293 83.185,-55.626
  rectangle net GND: 79.629,-54.483 83.185,-51.435
  rectangle net VCC: 79.629,-58.293 83.185,-55.626
  rectangle net GND: 79.629,-54.483 83.185,-51.435
  rectangle net GND: 39.878,-54.483 43.434,-51.435
  rectangle net VCC: 39.878,-58.293 43.434,-55.626
  rectangle net GND: 39.878,-54.483 43.434,-51.435
  rectangle net VCC: 39.878,-58.293 43.434,-55.626
  rectangle net VCC: 0.508,-58.293 4.064,-55.626
  rectangle net GND: 0.508,-54.483 4.064,-51.435
  text "3v3" at 22.606,73.406 h1
  text "3v3" at 61.976,73.406 h1
  text "3v3" at 101.727,73.406 h1
  text "3v3" at 10.033,73.279 h1
  text "3v3" at 49.403,73.279 h1
  text "3v3" at 89.154,73.279 h1
  text "gnd" at 10.033,46.863 h1
  text "gnd" at 19.05,46.863 h1
  text "gnd" at 49.403,46.863 h1
  text "gnd" at 58.42,46.863 h1
  text "gnd" at 89.154,46.863 h1
  text "gnd" at 98.171,46.863 h1
  text "stm32f030f4p6-tft-st7735-eval-brd-by-ailike" at 31.369,37.515 h1 r90
  text "stm32f030f4p6-tft-st7735-eval-brd-by-ailike" at 70.739,37.515 h1 r90
  text "stm32f030f4p6-tft-st7735-eval-brd-by-ailike" at 110.49,37.515 h1 r90
  text "3v3" at 18.592,29.21 h1
  text "3v3" at 57.962,29.21 h1
  text "3v3" at 97.713,29.21 h1
  text "GND" at 0.635,24.257 h1.52
  text "GND" at 40.005,24.257 h1.52
  text "GND" at 79.756,24.257 h1.52
  text "VCC" at 0.635,21.971 h1.52
  text "VCC" at 40.005,21.971 h1.52
  text "VCC" at 79.756,21.971 h1.52
  text "3v3" at 22.606,-12.446 h1
  text "3v3" at 61.976,-12.446 h1
  text "3v3" at 101.727,-12.446 h1
  text "3v3" at 10.033,-12.573 h1
  text "3v3" at 49.403,-12.573 h1
  text "3v3" at 89.154,-12.573 h1
  text "gnd" at 10.033,-38.989 h1
  text "gnd" at 19.05,-38.989 h1
  text "gnd" at 49.403,-38.989 h1
  text "gnd" at 58.42,-38.989 h1
  text "gnd" at 89.154,-38.989 h1
  text "gnd" at 98.171,-38.989 h1
  text "stm32f030f4p6-tft-st7735-eval-brd-by-ailike" at 31.369,-48.337 h1 r90
  text "stm32f030f4p6-tft-st7735-eval-brd-by-ailike" at 70.739,-48.337 h1 r90
  text "stm32f030f4p6-tft-st7735-eval-brd-by-ailike" at 110.49,-48.337 h1 r90
  text "3v3" at 18.592,-56.642 h1
  text "3v3" at 57.962,-56.642 h1
  text "3v3" at 97.713,-56.642 h1
  text "GND" at 0.635,-61.595 h1.52
  text "GND" at 40.005,-61.595 h1.52
  text "GND" at 79.756,-61.595 h1.52
  text "VCC" at 0.635,-63.881 h1.52
  text "VCC" at 40.005,-63.881 h1.52
  text "VCC" at 79.756,-63.881 h1.52

## Silkscreen, mask and mechanical layers (free items; w line width, h text height)
Top Solder:
  rectangle: 0.508,31.369 4.064,34.417
  rectangle: 0.508,27.559 4.064,30.226
  rectangle: 0.508,-58.293 4.064,-55.626
  rectangle: 0.508,-54.483 4.064,-51.435